# EAGLE board panelize-core1 (EAGLE 7.2.0)
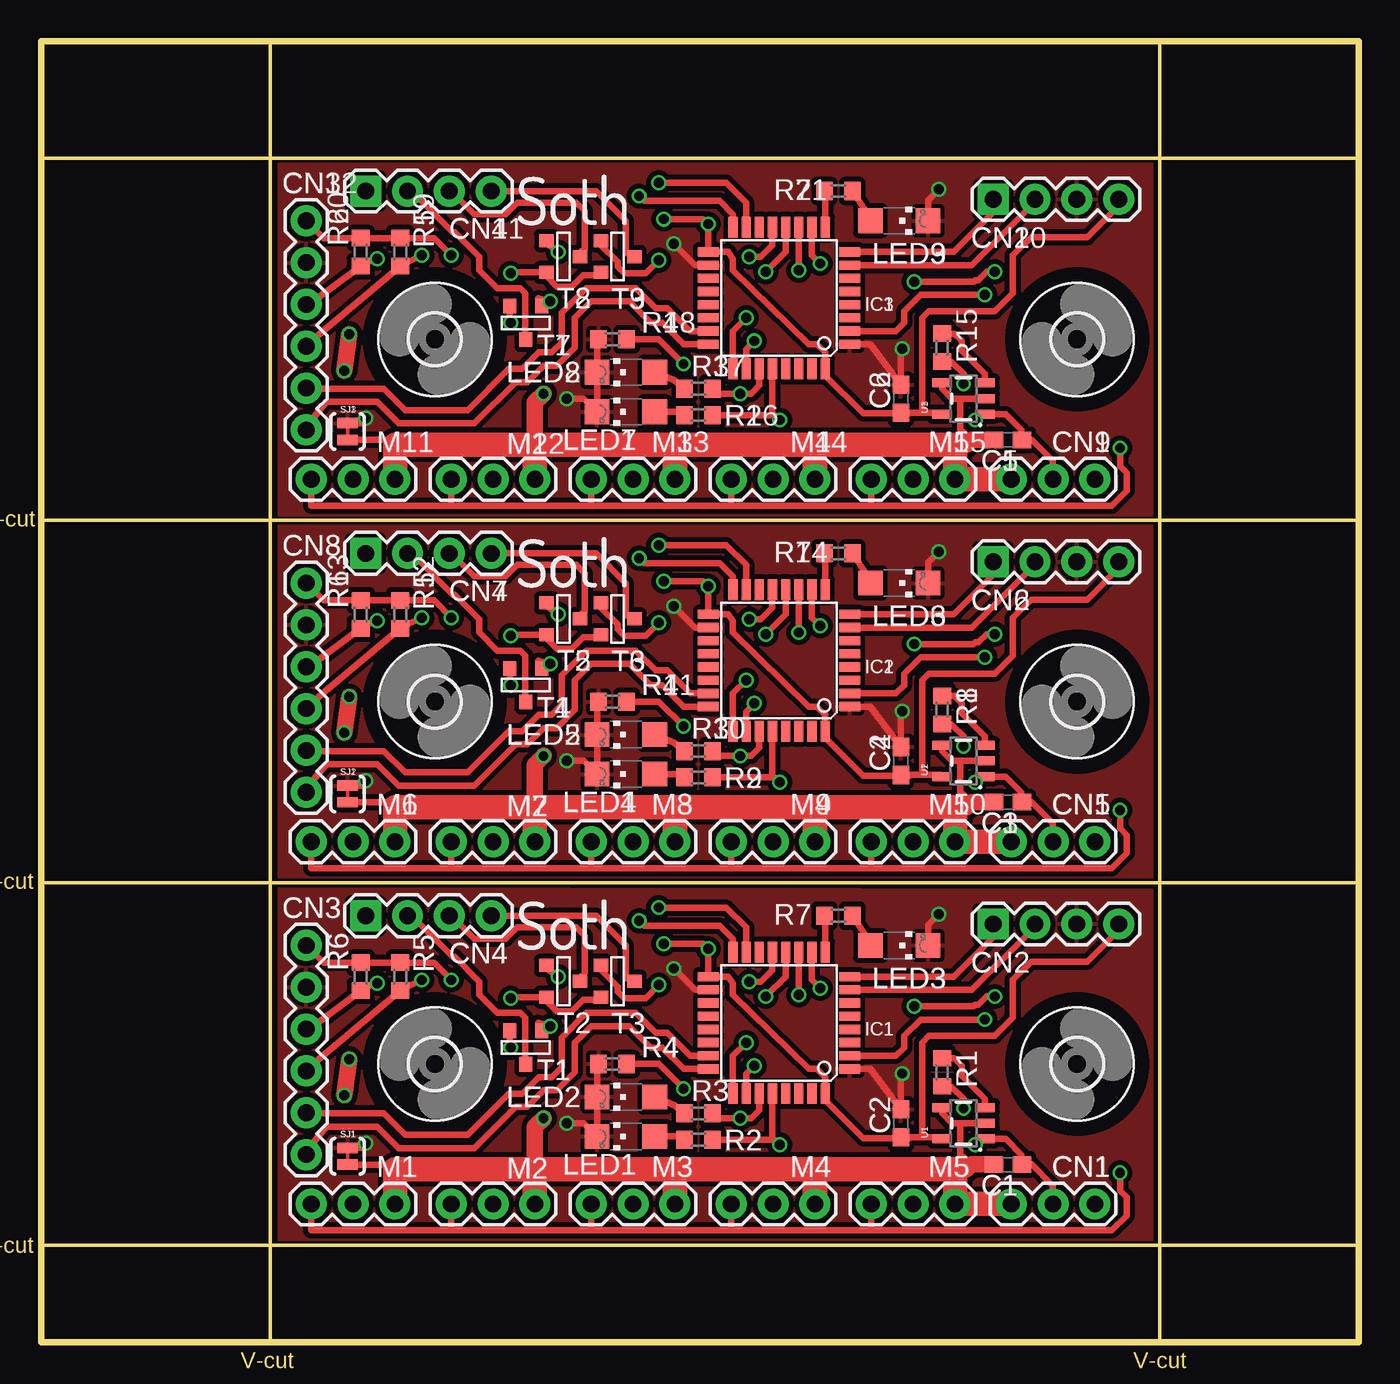
[diagram p0: board, top side]
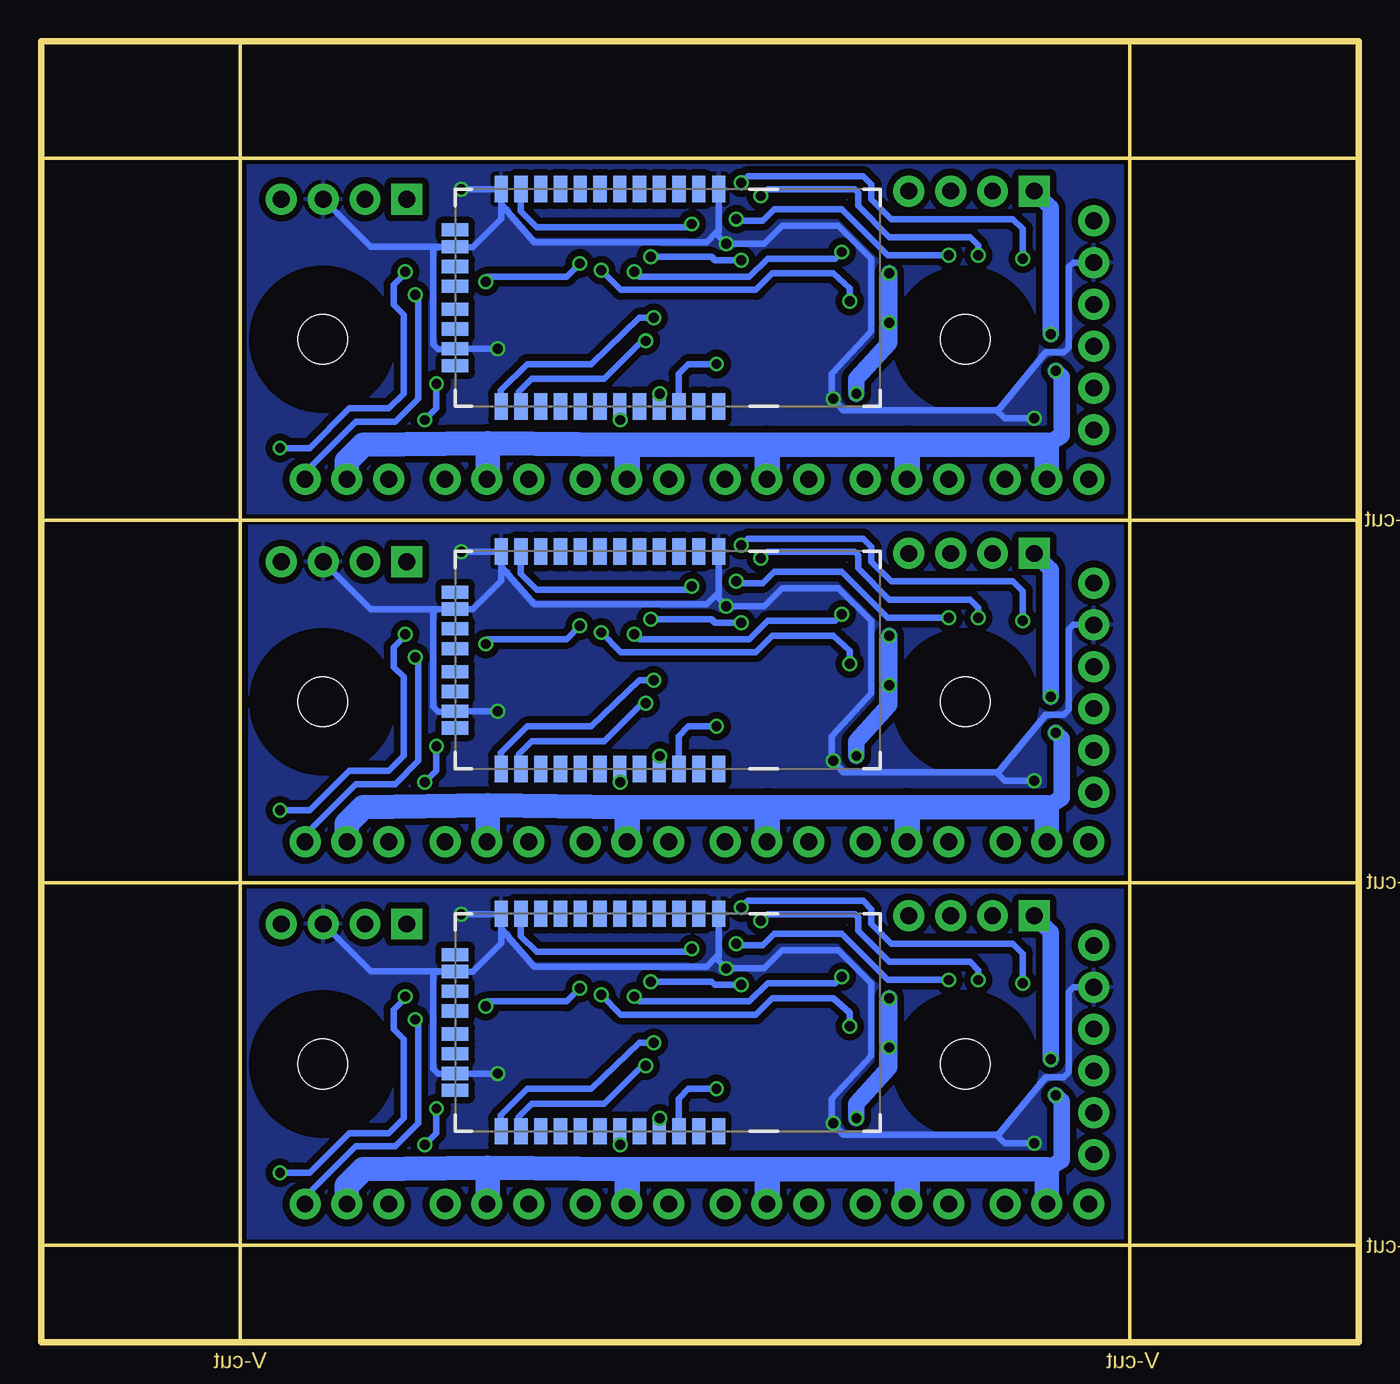
[diagram p1: board, bottom side, seen from below]

Size 80 x 79 mm. Coordinates in mm from the lower left corner, seen from the top.
Outline: 0,0 0,79 80,79 80,0 0,0
Copper layers (1*16): Top 0.035mm / dielectric 1.5mm / Bottom 0.035mm
Design rules "Elecrow_2-layer_eagle_rule": minimum track width 6mil, minimum drill 12mil, track to track 6mil, track to pad 6mil, pad to pad 6mil, via to via 6mil, smd to smd 0mil, copper to edge 10mil, drill to drill 10mil, minimum pad ring 10mil, minimum via ring 6mil, stop-mask expansion 2mil, vias tented up to drill 100mil, thermal gap 10mil
Net classes: 1 VCC5V: width 0.038 mm
Milling: 10 lines

## Footprints (pad centres in the part's own frame; a part is rotated, then mirrored left to right if it is on the bottom)
C1608 = smd 1.1 x 1: 1 -0.85,0; 2 0.85,0
1X03 = drill 1.016 pad 1.88: 1 0,0; 2 2.54,0; 3 5.08,0
1X04 = drill 1.016 pad 1.88 square: 1 0,0 | drill 1.016 pad 1.88: 2 2.54,0; 3 5.08,0; 4 7.62,0
1X06 = drill 1.016 pad 1.88: 1 0,0; 2 2.54,0; 3 5.08,0; 4 7.62,0; 5 10.16,0; 6 12.7,0
3,0 = hole 3: 0,0
TQFP32-08 = smd 1.27 x 0.559: 1 -4.293,2.8; 2 -4.293,2; 3 -4.293,1.2; 4 -4.293,0.4; 5 -4.293,-0.4; 6 -4.293,-1.2; 7 -4.293,-2; 8 -4.293,-2.8; 17 4.293,-2.8; 18 4.293,-2; 19 4.293,-1.2; 20 4.293,-0.4; 21 4.293,0.4; 22 4.293,1.2; 23 4.293,2; 24 4.293,2.8 | smd 0.559 x 1.27: 9 -2.8,-4.293; 10 -2,-4.293; 11 -1.2,-4.293; 12 -0.4,-4.293; 13 0.4,-4.293; 14 1.2,-4.293; 15 2,-4.293; 16 2.8,-4.293; 25 2.8,4.293; 26 2,4.293; 27 1.2,4.293; 28 0.4,4.293; 29 -0.4,4.293; 30 -1.2,4.293; 31 -2,4.293; 32 -2.8,4.293
CHIPLED_1206 = smd 1.5 x 1.5: A 0,-1.75; C 0,1.75
R0603 = smd 1 x 1.1: 1 -0.85,0; 2 0.85,0
SJ_2S-TRACE = smd 0.635 x 1.27: 1 -0.508,0; 2 0.508,0
SOT-23 = smd 0.787 x 0.889: 1 0.025,-1.016; 2 -0.94,1.016; 3 0.991,1.016
SOT23-5 = smd 0.55 x 1.2: 1 -0.95,-1.3; 2 0,-1.3; 3 0.95,-1.3; 4 0.95,1.3; 5 -0.95,1.3
RN41 = smd 0.8 x 1.6: 1 -6.6,-6.6; 2 -5.4,-6.6; 3 -4.2,-6.6; 4 -3,-6.6; 5 -1.8,-6.6; 6 -0.6,-6.6; 7 0.6,-6.6; 8 1.8,-6.6; 9 3,-6.6; 10 4.2,-6.6; 11 5.4,-6.6; 12 6.6,-6.6; 13 6.6,6.6; 14 5.4,6.6; 15 4.2,6.6; 16 3,6.6; 17 1.8,6.6; 18 0.6,6.6; 19 -0.6,6.6; 20 -1.8,6.6; 21 -3,6.6; 22 -4.2,6.6; 23 -5.4,6.6; 24 -6.6,6.6 | smd 1.6 x 0.8: 28 9.4,3.1; 29 9.4,-3.1; 30 9.4,4.122; 31 9.4,1.9; 32 9.4,0.7; 33 9.4,-0.7; 34 9.4,-1.9; 35 9.4,-4.122

## Placement (x,y rotation side)
C1  0u1  [C1608]  58.7,10.8 180 top
C2  1u  [C1608]  52.2,13.3 90 top
C3  0u1  [C1608]  58.7,32.8 180 top
C4  1u  [C1608]  52.2,35.3 90 top
C5  0u1  [C1608]  58.7,54.8 180 top
C6  1u  [C1608]  52.2,57.3 90 top
CN1  [1X03]  58.9,8.4 0 top
CN2  [1X04]  57.8,25.4 0 top
CN3  [1X06]  16.1,24.1 270 top
CN4  [1X04]  19.7,25.9 0 top
CN5  [1X03]  58.9,30.4 0 top
CN6  [1X04]  57.8,47.4 0 top
CN7  [1X04]  19.7,47.9 0 top
CN8  [1X06]  16.1,46.1 270 top
CN9  [1X03]  58.9,52.4 0 top
CN10  [1X04]  57.8,69.4 0 top
CN11  [1X04]  19.7,69.9 0 top
CN12  [1X06]  16.1,68.1 270 top
H1  MOUNT-HOLE3.0  [3,0]  23.9,16.9 90 top
H2  MOUNT-HOLE3.0  [3,0]  62.9,16.9 0 top
H3  MOUNT-HOLE3.0  [3,0]  23.9,38.9 90 top
H4  MOUNT-HOLE3.0  [3,0]  62.9,38.9 0 top
H5  MOUNT-HOLE3.0  [3,0]  23.9,60.9 90 top
H6  MOUNT-HOLE3.0  [3,0]  62.9,60.9 0 top
IC1  ATXMEGA32E5-AU  [TQFP32-08]  44.8,19.4 180 top
IC2  ATXMEGA32E5-AU  [TQFP32-08]  44.8,41.4 180 top
IC3  ATXMEGA32E5-AU  [TQFP32-08]  44.8,63.4 180 top
LED1  RED CONNECT  [CHIPLED_1206]  35.5,12.5 90 top
LED2  GREEN CONNECTED  [CHIPLED_1206]  35.5,14.9 90 top
LED3  GREEN STATUS  [CHIPLED_1206]  52.1,24.1 270 top
LED4  RED CONNECT  [CHIPLED_1206]  35.5,34.5 90 top
LED5  GREEN CONNECTED  [CHIPLED_1206]  35.5,36.9 90 top
LED6  GREEN STATUS  [CHIPLED_1206]  52.1,46.1 270 top
LED7  RED CONNECT  [CHIPLED_1206]  35.5,56.5 90 top
LED8  GREEN CONNECTED  [CHIPLED_1206]  35.5,58.9 90 top
LED9  GREEN STATUS  [CHIPLED_1206]  52.1,68.1 270 top
M1  SMALL_SERVO  [1X03]  16.4,8.4 0 top
M2  SMALL_SERVO  [1X03]  24.9,8.4 0 top
M3  SMALL_SERVO  [1X03]  33.4,8.4 0 top
M4  SMALL_SERVO  [1X03]  41.9,8.4 0 top
M5  SMALL_SERVO  [1X03]  50.4,8.4 0 top
M6  SMALL_SERVO  [1X03]  16.4,30.4 0 top
M7  SMALL_SERVO  [1X03]  24.9,30.4 0 top
M8  SMALL_SERVO  [1X03]  33.4,30.4 0 top
M9  SMALL_SERVO  [1X03]  41.9,30.4 0 top
M10  SMALL_SERVO  [1X03]  50.4,30.4 0 top
M11  SMALL_SERVO  [1X03]  16.4,52.4 0 top
M12  SMALL_SERVO  [1X03]  24.9,52.4 0 top
M13  SMALL_SERVO  [1X03]  33.4,52.4 0 top
M14  SMALL_SERVO  [1X03]  41.9,52.4 0 top
M15  SMALL_SERVO  [1X03]  50.4,52.4 0 top
R1  10k  [R0603]  54.7,16.4 90 top
R2  1k  [R0603]  39.9,12.3 0 top
R3  1k  [R0603]  39.9,13.9 0 top
R4  10k  [R0603]  34.7,16.9 0 top
R5  10k  [R0603]  21.8,22.2 90 top
R6  10k  [R0603]  19.4,22.2 90 top
R7  1k  [R0603]  48.4,25.9 0 top
R8  10k  [R0603]  54.7,38.4 90 top
R9  1k  [R0603]  39.9,34.3 0 top
R10  1k  [R0603]  39.9,35.9 0 top
R11  10k  [R0603]  34.7,38.9 0 top
R12  10k  [R0603]  21.8,44.2 90 top
R13  10k  [R0603]  19.4,44.2 90 top
R14  1k  [R0603]  48.4,47.9 0 top
R15  10k  [R0603]  54.7,60.4 90 top
R16  1k  [R0603]  39.9,56.3 0 top
R17  1k  [R0603]  39.9,57.9 0 top
R18  10k  [R0603]  34.7,60.9 0 top
R19  10k  [R0603]  21.8,66.2 90 top
R20  10k  [R0603]  19.4,66.2 90 top
R21  1k  [R0603]  48.4,69.9 0 top
SJ1  SOLDERJUMPERTRACE  [SJ_2S-TRACE]  18.6,11.3 90 top
SJ2  SOLDERJUMPERTRACE  [SJ_2S-TRACE]  18.6,33.3 90 top
SJ3  SOLDERJUMPERTRACE  [SJ_2S-TRACE]  18.6,55.3 90 top
T1  [SOT-23]  29.4,17.9 0 top
T2  [SOT-23]  31.7,21.9 90 top
T3  [SOT-23]  35,21.9 90 top
T4  [SOT-23]  29.4,39.9 0 top
T5  [SOT-23]  31.7,43.9 90 top
T6  [SOT-23]  35,43.9 90 top
T7  [SOT-23]  29.4,61.9 0 top
T8  [SOT-23]  31.7,65.9 90 top
T9  [SOT-23]  35,65.9 90 top
U1  LDO-TPS78233  [SOT23-5]  56,13.3 90 top
U2  LDO-TPS78233  [SOT23-5]  56,35.3 90 top
U3  LDO-TPS78233  [SOT23-5]  56,57.3 90 top
U$1  BLUETOOTH-RN41"  [RN41]  45.47,19.42 180 bottom
U$2  SOTH_LOGO  [SILK_LOGO]  28.96,23.83 0 top
U$3  BLUETOOTH-RN41"  [RN41]  45.47,41.42 180 bottom
U$4  SOTH_LOGO  [SILK_LOGO]  28.96,45.83 0 top
U$5  BLUETOOTH-RN41"  [RN41]  45.47,63.42 180 bottom
U$6  SOTH_LOGO  [SILK_LOGO]  28.96,67.83 0 top

## Library data of the parts
C1-C6 R1-R21 = rcl
CN1 CN2 CN4-CN7 CN9-CN11 = SparkFun-Connectors
CN3 CN8 CN12 = SparkFun-Connectors; PROD_ID: CONN-08437
H1-H6 = holes
IC1-IC3 = atmega-atxmega
LED1-LED9 = led
M1-M15 = SparkFun-Electromechanical
SJ1-SJ3 = SparkFun-Retired
T1-T9 = zetex; OC_FARNELL: unknown; OC_NEWARK: unknown
U1-U3 = SparkFun-PowerIC
U$1 U$3 U$5 = SparkFun-RF
U$2 U$4 U$6 = Soth

## Nets
+3V1 [VCC3V3]: C4.1 CN6.4 CN8.1 IC2.17 IC2.32 R12.2 R13.2 U2.5 U$3.11
+3V2 [VCC3V3]: C6.1 CN10.4 CN12.1 IC3.17 IC3.32 R19.2 R20.2 U3.5 U$5.11
+3V3 [VCC3V3]: C2.1 CN2.4 CN3.1 IC1.17 IC1.32 R5.2 R6.2 U1.5 U$1.11
+5V [VCC5V]: C1.1 CN1.2 CN4.1 M1.2 M2.2 M3.2 M4.2 M5.2 R1.1 U1.1
+5V1 [VCC5V]: C3.1 CN5.2 CN7.1 M6.2 M7.2 M8.2 M9.2 M10.2 R8.1 U2.1
+5V2 [VCC5V]: C5.1 CN9.2 CN11.1 M11.2 M12.2 M13.2 M14.2 M15.2 R15.1 U3.1
GND [GND5V]: C1.2 CN1.1 M1.3 M2.3 M3.3 M4.3 M5.3 SJ1.1 T1.2 T2.2 T3.2 U1.2 U1.4
GND1 [GND5V]: C3.2 CN5.1 M6.3 M7.3 M8.3 M9.3 M10.3 SJ2.1 T4.2 T5.2 T6.2 U2.2 U2.4
GND2 [GND5V]: C5.2 CN9.1 M11.3 M12.3 M13.3 M14.3 M15.3 SJ3.1 T7.2 T8.2 T9.2 U3.2 U3.4
GNDA [GND3V3]: C2.2 CN2.3 CN3.2 IC1.1 IC1.18 LED1.C LED2.C LED3.C R4.1 SJ1.2 U$1.1 U$1.12 U$1.28 U$1.29
GNDA1 [GND3V3]: C4.2 CN6.3 CN8.2 IC2.1 IC2.18 LED4.C LED5.C LED6.C R11.1 SJ2.2 U$3.1 U$3.12 U$3.28 U$3.29
GNDA2 [GND3V3]: C6.2 CN10.3 CN12.2 IC3.1 IC3.18 LED7.C LED8.C LED9.C R18.1 SJ3.2 U$5.1 U$5.12 U$5.28 U$5.29
N$1: CN4.2 T1.1
N$2: R1.2 U1.3
N$3: IC1.26 U$1.14
N$4: CN2.2 IC1.7
N$5: CN2.1 IC1.8
N$6: IC1.25 U$1.13
N$7: IC1.27 R3.2 U$1.21
N$8: LED2.A R3.1
N$9: LED1.A R2.1
N$10: IC1.28 R2.2 U$1.19
N$11: R4.2 U$1.22
N$12: CN3.4 IC1.16 R5.1
N$13: CN3.3 IC1.15 R6.1
N$14: CN1.3 IC1.2
N$15: CN4.3 T2.1
N$16: CN4.4 T3.1
N$17: IC1.9 R7.1
N$18: IC1.11 T1.3
N$19: CN3.6 IC1.24
N$20: IC1.10 M1.1 M2.1 M3.1 M4.1 M5.1
N$21: CN3.5 IC1.23
N$22: IC1.12 T2.3
N$23: IC1.13 T3.3
N$24: LED3.A R7.2
N$25: R8.2 U2.3
N$26: CN6.2 IC2.7
N$27: CN6.1 IC2.8
N$28: IC2.26 U$3.14
N$29: IC2.25 U$3.13
N$30: IC2.27 R10.2 U$3.21
N$31: LED5.A R10.1
N$32: LED4.A R9.1
N$33: IC2.28 R9.2 U$3.19
N$34: R11.2 U$3.22
N$35: CN8.4 IC2.16 R12.1
N$36: CN8.3 IC2.15 R13.1
N$37: CN5.3 IC2.2
N$38: IC2.10 M6.1 M7.1 M8.1 M9.1 M10.1
N$39: CN8.6 IC2.24
N$40: CN8.5 IC2.23
N$41: CN7.2 T4.1
N$42: CN7.3 T5.1
N$43: CN7.4 T6.1
N$44: IC2.11 T4.3
N$45: IC2.12 T5.3
N$46: IC2.13 T6.3
N$47: IC2.9 R14.1
N$48: LED6.A R14.2
N$49: R15.2 U3.3
N$50: CN10.2 IC3.7
N$51: CN10.1 IC3.8
N$52: IC3.26 U$5.14
N$53: IC3.25 U$5.13
N$54: IC3.27 R17.2 U$5.21
N$55: LED8.A R17.1
N$56: LED7.A R16.1
N$57: IC3.28 R16.2 U$5.19
N$58: R18.2 U$5.22
N$59: CN12.4 IC3.16 R19.1
N$60: CN12.3 IC3.15 R20.1
N$61: CN9.3 IC3.2
N$62: IC3.10 M11.1 M12.1 M13.1 M14.1 M15.1
N$63: CN12.6 IC3.24
N$64: CN12.5 IC3.23
N$65: CN11.2 T7.1
N$66: CN11.3 T8.1
N$67: CN11.4 T9.1
N$68: IC3.11 T7.3
N$69: IC3.12 T8.3
N$70: IC3.13 T9.3
N$71: IC3.9 R21.1
N$72: LED9.A R21.2

## Tracks (layer width: path | path; a pad name or v marks a point on that pad's centre or on a via)
+3V1  (via drill 0.6)
  Top 0.4: 53.8,34.45 C4.1 52.75,34.4 49.9,34.4 47.6,36.7 IC2.32 47.6,38.1 47.1,38.6 46.6,38.6 42,43.1 42,43.8 41.7,44.2 IC2.17 v40.5,45.9 40.2,46.2 v37.8,46.2 | 53.8,34.45 54.6,34.45 U2.5 | CN6.4 65.42,47.02 63.5,45.1 60.1,45.1 59,44 59,41.7 57.9,40.6 53.9,40.6 53.5,40.2 53.5,34.65 53.8,34.45 | R13.2 R12.2 | R12.2 17.15,45.05 CN8.1 | R12.2 23.85,45.05 v24.9,44
  Bottom 0.4: U$3.11 50.87,46.67 49.9,45.7 40.7,45.7 v40.5,45.9 | v24.9,44 28.6,44 31.4,46.8 35.5,46.8 36.2,46.1 37.7,46.1 v37.8,46.2
+3V2  (via drill 0.6)
  Top 0.4: 53.8,56.45 C6.1 52.75,56.4 49.9,56.4 47.6,58.7 IC3.32 47.6,60.1 47.1,60.6 46.6,60.6 42,65.1 42,65.8 41.7,66.2 IC3.17 v40.5,67.9 40.2,68.2 v37.8,68.2 | 53.8,56.45 54.6,56.45 U3.5 | CN10.4 65.42,69.02 63.5,67.1 60.1,67.1 59,66 59,63.7 57.9,62.6 53.9,62.6 53.5,62.2 53.5,56.65 53.8,56.45 | R20.2 R19.2 | R19.2 17.15,67.05 CN12.1 | R19.2 23.85,67.05 v24.9,66
  Bottom 0.4: U$5.11 50.87,68.67 49.9,67.7 40.7,67.7 v40.5,67.9 | v24.9,66 28.6,66 31.4,68.8 35.5,68.8 36.2,68.1 37.7,68.1 v37.8,68.2
+3V3  (via drill 0.6)
  Top 0.4: 53.8,12.45 C2.1 52.75,12.4 49.9,12.4 47.6,14.7 IC1.32 47.6,16.1 47.1,16.6 46.6,16.6 42,21.1 42,21.8 41.7,22.2 IC1.17 v40.5,23.9 40.2,24.2 v37.8,24.2 | 53.8,12.45 54.6,12.45 U1.5 | CN2.4 65.42,25.02 63.5,23.1 60.1,23.1 59,22 59,19.7 57.9,18.6 53.9,18.6 53.5,18.2 53.5,12.65 53.8,12.45 | R6.2 R5.2 | R5.2 17.15,23.05 CN3.1 | R5.2 23.85,23.05 v24.9,22
  Bottom 0.4: U$1.11 50.87,24.67 49.9,23.7 40.7,23.7 v40.5,23.9 | v24.9,22 28.6,22 31.4,24.8 35.5,24.8 36.2,24.1 37.7,24.1 v37.8,24.2
+5V  (via drill 0.6)
  Top 0.4: CN1.2 61.42,8.42 61.42,9.52 60.14,10.8 C1.1 59.5,10.85 59.5,11.4 58.55,12.35 U1.1 57.25,12.4 57.1,12.4 v56.7,12 | 55.05,15.55 R1.1 54.75,15.5 55.3,15.5 56,14.8 v56,14.2
  Top 1: v18.4,15 v18.7,17.2
  Bottom 0.4: v56.7,12 56,12.7 v56,14.2
  Bottom 1: 18.94,10.5 18.04,11.06 18.04,14.64 v18.4,15 | v18.7,17.2 18.7,24.9 CN4.1
  Bottom 1.5: 52.9,10.6 52.9,8.4 M5.2 | 52.9,10.6 44.44,10.5 M4.2 44.4,8.4 44.4,10.5 35.94,10.5 M3.2 35.9,8.4 35.9,10.5 27.44,10.5 M2.2 27.4,8.4 27.4,10.5 18.94,10.5 M1.2 | 52.9,10.6 60.44,10.5 61.44,9.5 CN1.2
+5V1  (via drill 0.6)
  Top 0.4: CN5.2 61.42,30.42 61.42,31.52 60.14,32.8 C3.1 59.5,32.85 59.5,33.4 58.55,34.35 U2.1 57.25,34.4 57.1,34.4 v56.7,34 | 55.05,37.55 R8.1 54.75,37.5 55.3,37.5 56,36.8 v56,36.2
  Top 1: v18.4,37 v18.7,39.2
  Bottom 0.4: v56.7,34 56,34.7 v56,36.2
  Bottom 1: 18.94,32.5 18.04,33.06 18.04,36.64 v18.4,37 | v18.7,39.2 18.7,46.9 CN7.1
  Bottom 1.5: 52.9,32.6 52.9,30.4 M10.2 | 52.9,32.6 44.44,32.5 M9.2 44.4,30.4 44.4,32.5 35.94,32.5 M8.2 35.9,30.4 35.9,32.5 27.44,32.5 M7.2 27.4,30.4 27.4,32.5 18.94,32.5 M6.2 | 52.9,32.6 60.44,32.5 61.44,31.5 CN5.2
+5V2  (via drill 0.6)
  Top 0.4: CN9.2 61.42,52.42 61.42,53.52 60.14,54.8 C5.1 59.5,54.85 59.5,55.4 58.55,56.35 U3.1 57.25,56.4 57.1,56.4 v56.7,56 | 55.05,59.55 R15.1 54.75,59.5 55.3,59.5 56,58.8 v56,58.2
  Top 1: v18.4,59 v18.7,61.2
  Bottom 0.4: v56.7,56 56,56.7 v56,58.2
  Bottom 1: 18.94,54.5 18.04,55.06 18.04,58.64 v18.4,59 | v18.7,61.2 18.7,68.9 CN11.1
  Bottom 1.5: 52.9,54.6 52.9,52.4 M15.2 | 52.9,54.6 44.44,54.5 M14.2 44.4,52.4 44.4,54.5 35.94,54.5 M13.2 35.9,52.4 35.9,54.5 27.44,54.5 M12.2 27.4,52.4 27.4,54.5 18.94,54.5 M11.2 | 52.9,54.6 60.44,54.5 61.44,53.5 CN9.2
GND  (via drill 0.6)
  Top 0.4: U1.4 54.7,13.9 55.3,13.3 U1.2 56,13.3 55.8,13.2 55.8,11.4 56.5,10.8 | v28.5,20.9 28.86,20.96 T2.2 30.68,20.72 31.3,20.1 32.2,20.1 32.9,20.8 33.82,20.8 T3.2 | T1.2 28.46,17.94 v28.5,17.9 | SJ1.1 21.21,10.79 21.5,10.5
  Top 1: 55.5,10.5 56.2,10.5 56.5,10.8 C1.2 | 29.98,10.5 29.98,13.08 v30.5,13.6
  Top 1.5: 47,10.5 55.5,10.5 55.5,8.4 M5.3 CN1.1 | 47,10.5 46.98,10.5 | 46.98,10.5 M4.3 47,8.4 47,10.5 | 46.98,10.5 38.5,10.5 | 38.5,10.5 38.48,10.5 | 38.48,10.5 M3.3 38.5,8.4 38.5,10.5 | 38.48,10.5 29.98,10.5 | M1.3 21.5,8.4 21.5,10.5 29.98,10.5 | 29.98,10.5 M2.3
  Bottom 1: v30.5,13.6 30.5,14.5 28.5,16.7 v28.5,17.9 v28.5,20.9
GND1  (via drill 0.6)
  Top 0.4: U2.4 54.7,35.9 55.3,35.3 U2.2 56,35.3 55.8,35.2 55.8,33.4 56.5,32.8 | v28.5,42.9 28.86,42.96 T5.2 30.68,42.72 31.3,42.1 32.2,42.1 32.9,42.8 33.82,42.8 T6.2 | T4.2 28.46,39.94 v28.5,39.9 | SJ2.1 21.21,32.79 21.5,32.5
  Top 1: 55.5,32.5 56.2,32.5 56.5,32.8 C3.2 | 29.98,32.5 29.98,35.08 v30.5,35.6
  Top 1.5: 47,32.5 55.5,32.5 55.5,30.4 M10.3 CN5.1 | 47,32.5 46.98,32.5 | 46.98,32.5 M9.3 47,30.4 47,32.5 | 46.98,32.5 38.5,32.5 | 38.5,32.5 38.48,32.5 | 38.48,32.5 M8.3 38.5,30.4 38.5,32.5 | 38.48,32.5 29.98,32.5 | M6.3 21.5,30.4 21.5,32.5 29.98,32.5 | 29.98,32.5 M7.3
  Bottom 1: v30.5,35.6 30.5,36.5 28.5,38.7 v28.5,39.9 v28.5,42.9
GND2  (via drill 0.6)
  Top 0.4: U3.4 54.7,57.9 55.3,57.3 U3.2 56,57.3 55.8,57.2 55.8,55.4 56.5,54.8 | v28.5,64.9 28.86,64.96 T8.2 30.68,64.72 31.3,64.1 32.2,64.1 32.9,64.8 33.82,64.8 T9.2 | T7.2 28.46,61.94 v28.5,61.9 | SJ3.1 21.21,54.79 21.5,54.5
  Top 1: 55.5,54.5 56.2,54.5 56.5,54.8 C5.2 | 29.98,54.5 29.98,57.08 v30.5,57.6
  Top 1.5: 47,54.5 55.5,54.5 55.5,52.4 M15.3 CN9.1 | 47,54.5 46.98,54.5 | 46.98,54.5 M14.3 47,52.4 47,54.5 | 46.98,54.5 38.5,54.5 | 38.5,54.5 38.48,54.5 | 38.48,54.5 M13.3 38.5,52.4 38.5,54.5 | 38.48,54.5 29.98,54.5 | M11.3 21.5,52.4 21.5,54.5 29.98,54.5 | 29.98,54.5 M12.3
  Bottom 1: v30.5,57.6 30.5,58.5 28.5,60.7 v28.5,61.9 v28.5,64.9
GNDA  (via drill 0.6)
  Top 0.4: v52.28,16.32 52.2,16.44 C2.2 50.35,16.6 IC1.1 | IC1.18 39.7,21.4 v38.4,22.7 | LED1.C LED2.C | LED1.C 33.75,17 R4.1 | v31.9,13.3 32.95,13.3 LED1.C | SJ1.2 19.51,11.81 v19.7,12.1 | LED3.C 53.85,25.35 v54.5,26
  Bottom 0.4: U$1.1 38.87,23.43 38.9,23.4 | 52.07,25.1 U$1.12 52.09,26 v54.5,26 | v52.28,16.32 U$1.28 54.89,16.3 55.9,16.3 56.2,16.6 56.2,22.4 56.1,22.5 54.85,22.5 | CN2.3 60,22.52 U$1.29 54.85,22.5 | 38.9,23.4 38.9,23.2 v38.4,22.7 36.1,22.7 35,23.8 31.6,23.8 29.6,21.8 29.6,17.4 32,14.8 32,13.4 v31.9,13.3 31.3,12.6 22,12.6 | 38.9,23.4 39,23.4 39.6,22.8 50.07,22.8 52.07,25.1 | 52.07,25.1 52.07,24.23 53.8,22.5 54.85,22.5 | CN3.2 17.34,21.56 17.6,21.3 17.6,16.4 17.9,16.1 19,16.1 21.9,12.6 22,12.6 | v19.7,12.1 21.5,12.1 22,12.6
  pour Bottom (isolate 0.4): 14.3,27.5 67.5,27.5 67.5,6.3 14.3,6.3
  pour Top (isolate 0.3): 14.4,27.6 67.5,27.5 67.5,6.2 14.4,6.2
GNDA1  (via drill 0.6)
  Top 0.4: v52.28,38.32 52.2,38.44 C4.2 50.35,38.6 IC2.1 | IC2.18 39.7,43.4 v38.4,44.7 | LED4.C LED5.C | LED4.C 33.75,39 R11.1 | v31.9,35.3 32.95,35.3 LED4.C | SJ2.2 19.51,33.81 v19.7,34.1 | LED6.C 53.85,47.35 v54.5,48
  Bottom 0.4: U$3.1 38.87,45.43 38.9,45.4 | 52.07,47.1 U$3.12 52.09,48 v54.5,48 | v52.28,38.32 U$3.28 54.89,38.3 55.9,38.3 56.2,38.6 56.2,44.4 56.1,44.5 54.85,44.5 | CN6.3 60,44.52 U$3.29 54.85,44.5 | 38.9,45.4 38.9,45.2 v38.4,44.7 36.1,44.7 35,45.8 31.6,45.8 29.6,43.8 29.6,39.4 32,36.8 32,35.4 v31.9,35.3 31.3,34.6 22,34.6 | 38.9,45.4 39,45.4 39.6,44.8 50.07,44.8 52.07,47.1 | 52.07,47.1 52.07,46.23 53.8,44.5 54.85,44.5 | CN8.2 17.34,43.56 17.6,43.3 17.6,38.4 17.9,38.1 19,38.1 21.9,34.6 22,34.6 | v19.7,34.1 21.5,34.1 22,34.6
  pour Bottom (isolate 0.4): 14.3,49.6 67.4,49.6 67.4,28.4 14.3,28.4
  pour Top (isolate 0.3): 14.4,49.6 67.5,49.6 67.5,28.2 14.4,28.2
GNDA2  (via drill 0.6)
  Top 0.4: v52.28,60.32 52.2,60.44 C6.2 50.35,60.6 IC3.1 | IC3.18 39.7,65.4 v38.4,66.7 | LED7.C LED8.C | LED7.C 33.75,61 R18.1 | v31.9,57.3 32.95,57.3 LED7.C | SJ3.2 19.51,55.81 v19.7,56.1 | LED9.C 53.85,69.35 v54.5,70
  Bottom 0.4: U$5.1 38.87,67.43 38.9,67.4 | 52.07,69.1 U$5.12 52.09,70 v54.5,70 | v52.28,60.32 U$5.28 54.89,60.3 55.9,60.3 56.2,60.6 56.2,66.4 56.1,66.5 54.85,66.5 | CN10.3 60,66.52 U$5.29 54.85,66.5 | 38.9,67.4 38.9,67.2 v38.4,66.7 36.1,66.7 35,67.8 31.6,67.8 29.6,65.8 29.6,61.4 32,58.8 32,57.4 v31.9,57.3 31.3,56.6 22,56.6 | 38.9,67.4 39,67.4 39.6,66.8 50.07,66.8 52.07,69.1 | 52.07,69.1 52.07,68.23 53.8,66.5 54.85,66.5 | CN12.2 17.34,65.56 17.6,65.3 17.6,60.4 17.9,60.1 19,60.1 21.9,56.6 22,56.6 | v19.7,56.1 21.5,56.1 22,56.6
  pour Top (isolate 0.3): 14.4,71.6 67.5,71.6 67.5,50.2 14.4,50.2
  pour Bottom (isolate 0.4): 14.3,71.5 67.5,71.5 67.5,50.3 14.3,50.3
N$1
  Top 0.4: CN4.2 22.5,25.9 25,23.4 25.1,23.4 26.6,21.9 26.6,21.1 27.7,20 29.1,20 29.4,19.7 29.4,16.91 T1.1
N$2
  Top 0.4: R1.2 55.45,17.25 55.9,16.8 55.9,16.2 57.3,14.8 U1.3 | U1.3
N$3  (via drill 0.6)
  Top 0.4: IC1.26 42.8,16.3 v43.3,16.8
  Bottom 0.4: v43.3,16.8 43.5,16.8 45.8,14.5 50.2,14.5 51,13.7 51,12.95 U$1.14
N$4
  Top 0.4: CN2.2 60.34,25.24 56.5,21.4 IC1.7
N$5
  Top 0.4: IC1.8 55.4,22.2 57.9,24.7 57.9,25.3 CN2.1
N$6  (via drill 0.6)
  Top 0.4: IC1.25 42,17.4 v42.8,18.2
  Bottom 0.4: v42.8,18.2 43.7,18.2 46.6,15.4 50.5,15.4 52.1,13.8 52.1,12.85 U$1.13
N$7  (via drill 0.6)
  Top 0.4: IC1.27 43.6,14.1 43.1,13.6 v42.45,13.6 40.95,13.6 R3.2
  Bottom 0.4: v42.45,13.6 42.4,12.89 U$1.21
N$8
  Top 0.4: LED2.A 38.45,14.4 R3.1
N$9
  Top 0.4: LED1.A 38.85,12.5 R2.1
N$10  (via drill 0.6)
  Top 0.4: R2.2 44.5,12.3 v44.85,12 44.4,12.4 IC1.28
  Bottom 0.4: v44.85,12 44.8,12.75 U$1.19
N$11  (via drill 0.6)
  Top 0.4: R4.2 37.5,16.9 v39,15.4
  Bottom 0.4: v39,15.4 40.7,15.4 41.3,14.8 41.3,12.85 U$1.22
N$12  (via drill 0.6)
  Top 0.4: CN3.4 16.1,16.55 R5.1 21.75,21.35 v23.1,22 | v36.3,25.6 36.6,25.3 41.2,25.3 42,24.5 IC1.16
  Bottom 0.4: v23.1,22 23.1,22.6 23.6,23.1 28.5,23.1 30.4,25 30.4,25.8 30.6,26 35.9,26 v36.3,25.6
N$13  (via drill 0.6)
  Top 0.4: CN3.3 16.27,19.02 R6.1 19.05,21.35 v20.4,21.8 | v37.5,26.4 41.6,26.4 42.8,25.2 IC1.15
  Bottom 0.4: v20.4,21.8 20.4,23.6 21,24.2 28.4,24.2 29.6,25.4 29.6,26.3 30.1,26.8 37.1,26.8 v37.5,26.4
N$14  (via drill 0.6)
  Top 0.4: v57.3,19.6 57.3,19.7 56.8,19.6 53.4,19.6 52.4,18.6 52.4,17.9 51.9,17.4 IC1.2
  Bottom 0.4: 57.4,19.6 v57.3,19.6 57.1,19.8 57.1,13.3 58.5,11.9 60.9,11.9 64,8.8 64,8.42 CN1.3
N$15
  Top 0.4: CN4.3 24.9,25.9 26.3,24.5 28.2,24.5 28.9,25.2 32.5,25.2 33,24.7 33,22.41 T2.1 32.8,22.24
N$16
  Top 0.4: CN4.4 33.7,25.9 35.5,24.1 35.5,22.14 T3.1
N$17
  Top 0.4: IC1.9 47.6,25.45 R7.1
N$18  (via drill 0.6)
  Top 0.4: T1.3 30.19,19.39 v30.9,19.2 | v46,21.1 IC1.11
  Bottom 0.4: v30.9,19.2 30.9,20 31.9,20.9 35.6,20.9 36.6,19.9 44.8,19.9 v46,21.1
N$19
  Top 0.4: IC1.24 39,16.6 37.7,17.9 37,17.9 35.7,19.2 33.4,19.2 32.4,18.2 32.4,16.4 31.3,15.3 30.5,15.3 29.5,14.3 28.8,14.3 26.3,11.8 21.7,11.8 20.4,13.1 17.3,13.1 16.1,11.6 CN3.6 16.1,11.3
N$20  (via drill 0.6)
  Top 0.4: M1.1 16.4,6.8 24.9,6.8 | M2.1 24.9,6.8 | 24.9,6.8 33.4,6.8 | M3.1 33.4,6.8 | 33.4,6.8 41.9,6.8 | M4.1 41.9,6.8 | 41.9,6.8 50.4,6.8 | 50.4,6.8 M5.1 | IC1.10 46.8,22 v47.3,21.5 | v53,20.4 56.6,20.4 56.7,20.5 56.9,20.5 57.4,21 v57.9,21 | v65.5,10.3 65.5,9.2 65.9,8.8 65.9,7.7 65,6.8 50.4,6.8
  Bottom 0.4: v47.3,21.5 48.1,20.7 52.9,20.7 v53,20.4 | v57.9,21 57.9,20.9 58.6,20.2 58.6,19 58,18.4 58,13.6 58.9,12.7 61.3,12.7 63.7,10.3 v65.5,10.3
N$21
  Top 0.4: IC1.23 39.4,17.4 38,18.8 37.3,18.8 36.1,20 33.1,20 31.6,18.5 31.6,16.7 31,16.1 30.2,16.1 29.2,15.1 28.4,15.1 25.9,12.6 22.1,12.6 20.8,13.9 16.1,13.9 CN3.5 16.1,14
N$22  (via drill 0.6)
  Top 0.4: T2.3 30.68,22.72 v31.4,22.2 | v44,21 45.2,22.2 IC1.12
  Bottom 0.4: v44,21 43.7,20.7 37,20.7 35.9,21.8 31.8,21.8 v31.4,22.2
N$23  (via drill 0.6)
  Top 0.4: T3.3 33.98,22.62 35,21.6 35,21.3 35.4,20.9 36.7,20.9 v37.5,21.7 | v43,21.9 43.7,21.9 44.4,22.6 IC1.13
  Bottom 0.4: v37.5,21.7 39.1,21.7 39.3,21.9 v43,21.9
N$24
  Top 0.4: R7.2 50.35,24.3 LED3.A
N$25
  Top 0.4: R8.2 55.45,39.25 55.9,38.8 55.9,38.2 57.3,36.8 U2.3 | U2.3
N$26
  Top 0.4: CN6.2 60.34,47.24 56.5,43.4 IC2.7
N$27
  Top 0.4: IC2.8 55.4,44.2 57.9,46.7 57.9,47.3 CN6.1
N$28  (via drill 0.6)
  Top 0.4: IC2.26 42.8,38.3 v43.3,38.8
  Bottom 0.4: v43.3,38.8 43.5,38.8 45.8,36.5 50.2,36.5 51,35.7 51,34.95 U$3.14
N$29  (via drill 0.6)
  Top 0.4: IC2.25 42,39.4 v42.8,40.2
  Bottom 0.4: v42.8,40.2 43.7,40.2 46.6,37.4 50.5,37.4 52.1,35.8 52.1,34.85 U$3.13
N$30  (via drill 0.6)
  Top 0.4: IC2.27 43.6,36.1 43.1,35.6 v42.45,35.6 40.95,35.6 R10.2
  Bottom 0.4: v42.45,35.6 42.4,34.89 U$3.21
N$31
  Top 0.4: LED5.A 38.45,36.4 R10.1
N$32
  Top 0.4: LED4.A 38.85,34.5 R9.1
N$33  (via drill 0.6)
  Top 0.4: R9.2 44.5,34.3 v44.85,34 44.4,34.4 IC2.28
  Bottom 0.4: v44.85,34 44.8,34.75 U$3.19
N$34  (via drill 0.6)
  Top 0.4: R11.2 37.5,38.9 v39,37.4
  Bottom 0.4: v39,37.4 40.7,37.4 41.3,36.8 41.3,34.85 U$3.22
N$35  (via drill 0.6)
  Top 0.4: CN8.4 16.1,38.55 R12.1 21.75,43.35 v23.1,44 | v36.3,47.6 36.6,47.3 41.2,47.3 42,46.5 IC2.16
  Bottom 0.4: v23.1,44 23.1,44.6 23.6,45.1 28.5,45.1 30.4,47 30.4,47.8 30.6,48 35.9,48 v36.3,47.6
N$36  (via drill 0.6)
  Top 0.4: CN8.3 16.27,41.02 R13.1 19.05,43.35 v20.4,43.8 | v37.5,48.4 41.6,48.4 42.8,47.2 IC2.15
  Bottom 0.4: v20.4,43.8 20.4,45.6 21,46.2 28.4,46.2 29.6,47.4 29.6,48.3 30.1,48.8 37.1,48.8 v37.5,48.4
N$37  (via drill 0.6)
  Top 0.4: v57.3,41.6 57.3,41.7 56.8,41.6 53.4,41.6 52.4,40.6 52.4,39.9 51.9,39.4 IC2.2
  Bottom 0.4: 57.4,41.6 v57.3,41.6 57.1,41.8 57.1,35.3 58.5,33.9 60.9,33.9 64,30.8 64,30.42 CN5.3
N$38  (via drill 0.6)
  Top 0.4: M6.1 16.4,28.8 24.9,28.8 | M7.1 24.9,28.8 | 24.9,28.8 33.4,28.8 | M8.1 33.4,28.8 | 33.4,28.8 41.9,28.8 | M9.1 41.9,28.8 | 41.9,28.8 50.4,28.8 | 50.4,28.8 M10.1 | IC2.10 46.8,44 v47.3,43.5 | v53,42.4 56.6,42.4 56.7,42.5 56.9,42.5 57.4,43 v57.9,43 | v65.5,32.3 65.5,31.2 65.9,30.8 65.9,29.7 65,28.8 50.4,28.8
  Bottom 0.4: v47.3,43.5 48.1,42.7 52.9,42.7 v53,42.4 | v57.9,43 57.9,42.9 58.6,42.2 58.6,41 58,40.4 58,35.6 58.9,34.7 61.3,34.7 63.7,32.3 v65.5,32.3
N$39
  Top 0.4: IC2.24 39,38.6 37.7,39.9 37,39.9 35.7,41.2 33.4,41.2 32.4,40.2 32.4,38.4 31.3,37.3 30.5,37.3 29.5,36.3 28.8,36.3 26.3,33.8 21.7,33.8 20.4,35.1 17.3,35.1 16.1,33.6 CN8.6 16.1,33.3
N$40
  Top 0.4: IC2.23 39.4,39.4 38,40.8 37.3,40.8 36.1,42 33.1,42 31.6,40.5 31.6,38.7 31,38.1 30.2,38.1 29.2,37.1 28.4,37.1 25.9,34.6 22.1,34.6 20.8,35.9 16.1,35.9 CN8.5 16.1,36
N$41
  Top 0.4: CN7.2 22.5,47.9 25,45.4 25.1,45.4 26.6,43.9 26.6,43.1 27.7,42 29.1,42 29.4,41.7 29.4,38.91 T4.1
N$42
  Top 0.4: CN7.3 24.9,47.9 26.3,46.5 28.2,46.5 28.9,47.2 32.5,47.2 33,46.7 33,44.41 T5.1 32.8,44.24
N$43
  Top 0.4: CN7.4 33.7,47.9 35.5,46.1 35.5,44.14 T6.1
N$44  (via drill 0.6)
  Top 0.4: T4.3 30.19,41.39 v30.9,41.2 | v46,43.1 IC2.11
  Bottom 0.4: v30.9,41.2 30.9,42 31.9,42.9 35.6,42.9 36.6,41.9 44.8,41.9 v46,43.1
N$45  (via drill 0.6)
  Top 0.4: T5.3 30.68,44.72 v31.4,44.2 | v44,43 45.2,44.2 IC2.12
  Bottom 0.4: v44,43 43.7,42.7 37,42.7 35.9,43.8 31.8,43.8 v31.4,44.2
N$46  (via drill 0.6)
  Top 0.4: T6.3 33.98,44.62 35,43.6 35,43.3 35.4,42.9 36.7,42.9 v37.5,43.7 | v43,43.9 43.7,43.9 44.4,44.6 IC2.13
  Bottom 0.4: v37.5,43.7 39.1,43.7 39.3,43.9 v43,43.9
N$47
  Top 0.4: IC2.9 47.6,47.45 R14.1
N$48
  Top 0.4: R14.2 50.35,46.3 LED6.A
N$49
  Top 0.4: R15.2 55.45,61.25 55.9,60.8 55.9,60.2 57.3,58.8 U3.3 | U3.3
N$50
  Top 0.4: CN10.2 60.34,69.24 56.5,65.4 IC3.7
N$51
  Top 0.4: IC3.8 55.4,66.2 57.9,68.7 57.9,69.3 CN10.1
N$52  (via drill 0.6)
  Top 0.4: IC3.26 42.8,60.3 v43.3,60.8
  Bottom 0.4: v43.3,60.8 43.5,60.8 45.8,58.5 50.2,58.5 51,57.7 51,56.95 U$5.14
N$53  (via drill 0.6)
  Top 0.4: IC3.25 42,61.4 v42.8,62.2
  Bottom 0.4: v42.8,62.2 43.7,62.2 46.6,59.4 50.5,59.4 52.1,57.8 52.1,56.85 U$5.13
N$54  (via drill 0.6)
  Top 0.4: IC3.27 43.6,58.1 43.1,57.6 v42.45,57.6 40.95,57.6 R17.2
  Bottom 0.4: v42.45,57.6 42.4,56.89 U$5.21
N$55
  Top 0.4: LED8.A 38.45,58.4 R17.1
N$56
  Top 0.4: LED7.A 38.85,56.5 R16.1
N$57  (via drill 0.6)
  Top 0.4: R16.2 44.5,56.3 v44.85,56 44.4,56.4 IC3.28
  Bottom 0.4: v44.85,56 44.8,56.75 U$5.19
N$58  (via drill 0.6)
  Top 0.4: R18.2 37.5,60.9 v39,59.4
  Bottom 0.4: v39,59.4 40.7,59.4 41.3,58.8 41.3,56.85 U$5.22
N$59  (via drill 0.6)
  Top 0.4: CN12.4 16.1,60.55 R19.1 21.75,65.35 v23.1,66 | v36.3,69.6 36.6,69.3 41.2,69.3 42,68.5 IC3.16
  Bottom 0.4: v23.1,66 23.1,66.6 23.6,67.1 28.5,67.1 30.4,69 30.4,69.8 30.6,70 35.9,70 v36.3,69.6
N$60  (via drill 0.6)
  Top 0.4: CN12.3 16.27,63.02 R20.1 19.05,65.35 v20.4,65.8 | v37.5,70.4 41.6,70.4 42.8,69.2 IC3.15
  Bottom 0.4: v20.4,65.8 20.4,67.6 21,68.2 28.4,68.2 29.6,69.4 29.6,70.3 30.1,70.8 37.1,70.8 v37.5,70.4
N$61  (via drill 0.6)
  Top 0.4: v57.3,63.6 57.3,63.7 56.8,63.6 53.4,63.6 52.4,62.6 52.4,61.9 51.9,61.4 IC3.2
  Bottom 0.4: 57.4,63.6 v57.3,63.6 57.1,63.8 57.1,57.3 58.5,55.9 60.9,55.9 64,52.8 64,52.42 CN9.3
N$62  (via drill 0.6)
  Top 0.4: M11.1 16.4,50.8 24.9,50.8 | M12.1 24.9,50.8 | 24.9,50.8 33.4,50.8 | M13.1 33.4,50.8 | 33.4,50.8 41.9,50.8 | M14.1 41.9,50.8 | 41.9,50.8 50.4,50.8 | 50.4,50.8 M15.1 | IC3.10 46.8,66 v47.3,65.5 | v53,64.4 56.6,64.4 56.7,64.5 56.9,64.5 57.4,65 v57.9,65 | v65.5,54.3 65.5,53.2 65.9,52.8 65.9,51.7 65,50.8 50.4,50.8
  Bottom 0.4: v47.3,65.5 48.1,64.7 52.9,64.7 v53,64.4 | v57.9,65 57.9,64.9 58.6,64.2 58.6,63 58,62.4 58,57.6 58.9,56.7 61.3,56.7 63.7,54.3 v65.5,54.3
N$63
  Top 0.4: IC3.24 39,60.6 37.7,61.9 37,61.9 35.7,63.2 33.4,63.2 32.4,62.2 32.4,60.4 31.3,59.3 30.5,59.3 29.5,58.3 28.8,58.3 26.3,55.8 21.7,55.8 20.4,57.1 17.3,57.1 16.1,55.6 CN12.6 16.1,55.3
N$64
  Top 0.4: IC3.23 39.4,61.4 38,62.8 37.3,62.8 36.1,64 33.1,64 31.6,62.5 31.6,60.7 31,60.1 30.2,60.1 29.2,59.1 28.4,59.1 25.9,56.6 22.1,56.6 20.8,57.9 16.1,57.9 CN12.5 16.1,58
N$65
  Top 0.4: CN11.2 22.5,69.9 25,67.4 25.1,67.4 26.6,65.9 26.6,65.1 27.7,64 29.1,64 29.4,63.7 29.4,60.91 T7.1
N$66
  Top 0.4: CN11.3 24.9,69.9 26.3,68.5 28.2,68.5 28.9,69.2 32.5,69.2 33,68.7 33,66.41 T8.1 32.8,66.24
N$67
  Top 0.4: CN11.4 33.7,69.9 35.5,68.1 35.5,66.14 T9.1
N$68  (via drill 0.6)
  Top 0.4: T7.3 30.19,63.39 v30.9,63.2 | v46,65.1 IC3.11
  Bottom 0.4: v30.9,63.2 30.9,64 31.9,64.9 35.6,64.9 36.6,63.9 44.8,63.9 v46,65.1
N$69  (via drill 0.6)
  Top 0.4: T8.3 30.68,66.72 v31.4,66.2 | v44,65 45.2,66.2 IC3.12
  Bottom 0.4: v44,65 43.7,64.7 37,64.7 35.9,65.8 31.8,65.8 v31.4,66.2
N$70  (via drill 0.6)
  Top 0.4: T9.3 33.98,66.62 35,65.6 35,65.3 35.4,64.9 36.7,64.9 v37.5,65.7 | v43,65.9 43.7,65.9 44.4,66.6 IC3.13
  Bottom 0.4: v37.5,65.7 39.1,65.7 39.3,65.9 v43,65.9
N$71
  Top 0.4: IC3.9 47.6,69.45 R21.1
N$72
  Top 0.4: R21.2 50.35,68.3 LED9.A

## Text on the board
Milling: V-cut | V-cut | V-cut | V-cut | V-cut
_tNames: CN3 | R7 | R6 | CN4 | R5 | CN2 | LED3 | T2 | T3 | IC1 | R4 | T1 | LED2 | R3 | R1 | SJ1 | C2 | R2 | U1 | LED1 | M1 | M2 | M3 | M4 | M5 | C1 | CN1 | CN3 | R7 | R6 | CN4 | R5 | CN2 | LED3 | T2 | T3 | IC1 | R4 | T1 | LED2 | R3 | R1 | SJ1 | C2 | R2 | U1 | LED1 | M1 | M2 | M3 | M4 | M5 | C1 | CN1 | CN3 | R7 | R6 | CN4 | R5 | CN2 | LED3 | T2 | T3 | IC1 | R4 | T1 | LED2 | R3 | R1 | SJ1 | C2 | R2 | U1 | LED1 | M1 | M2 | M3 | M4 | M5 | C1 | CN1